# Altium PCB 20240611-SMARTCAGE-PCB-V2.PcbDoc
Units mm, origin at the board's own origin, x right, y up, seen from the top; angles counter-clockwise.
Board outline 90 x 85 mm, 2 copper layers (F.Cu, B.Cu); 9 components, 51 nets, 86 pads, 0 vias.
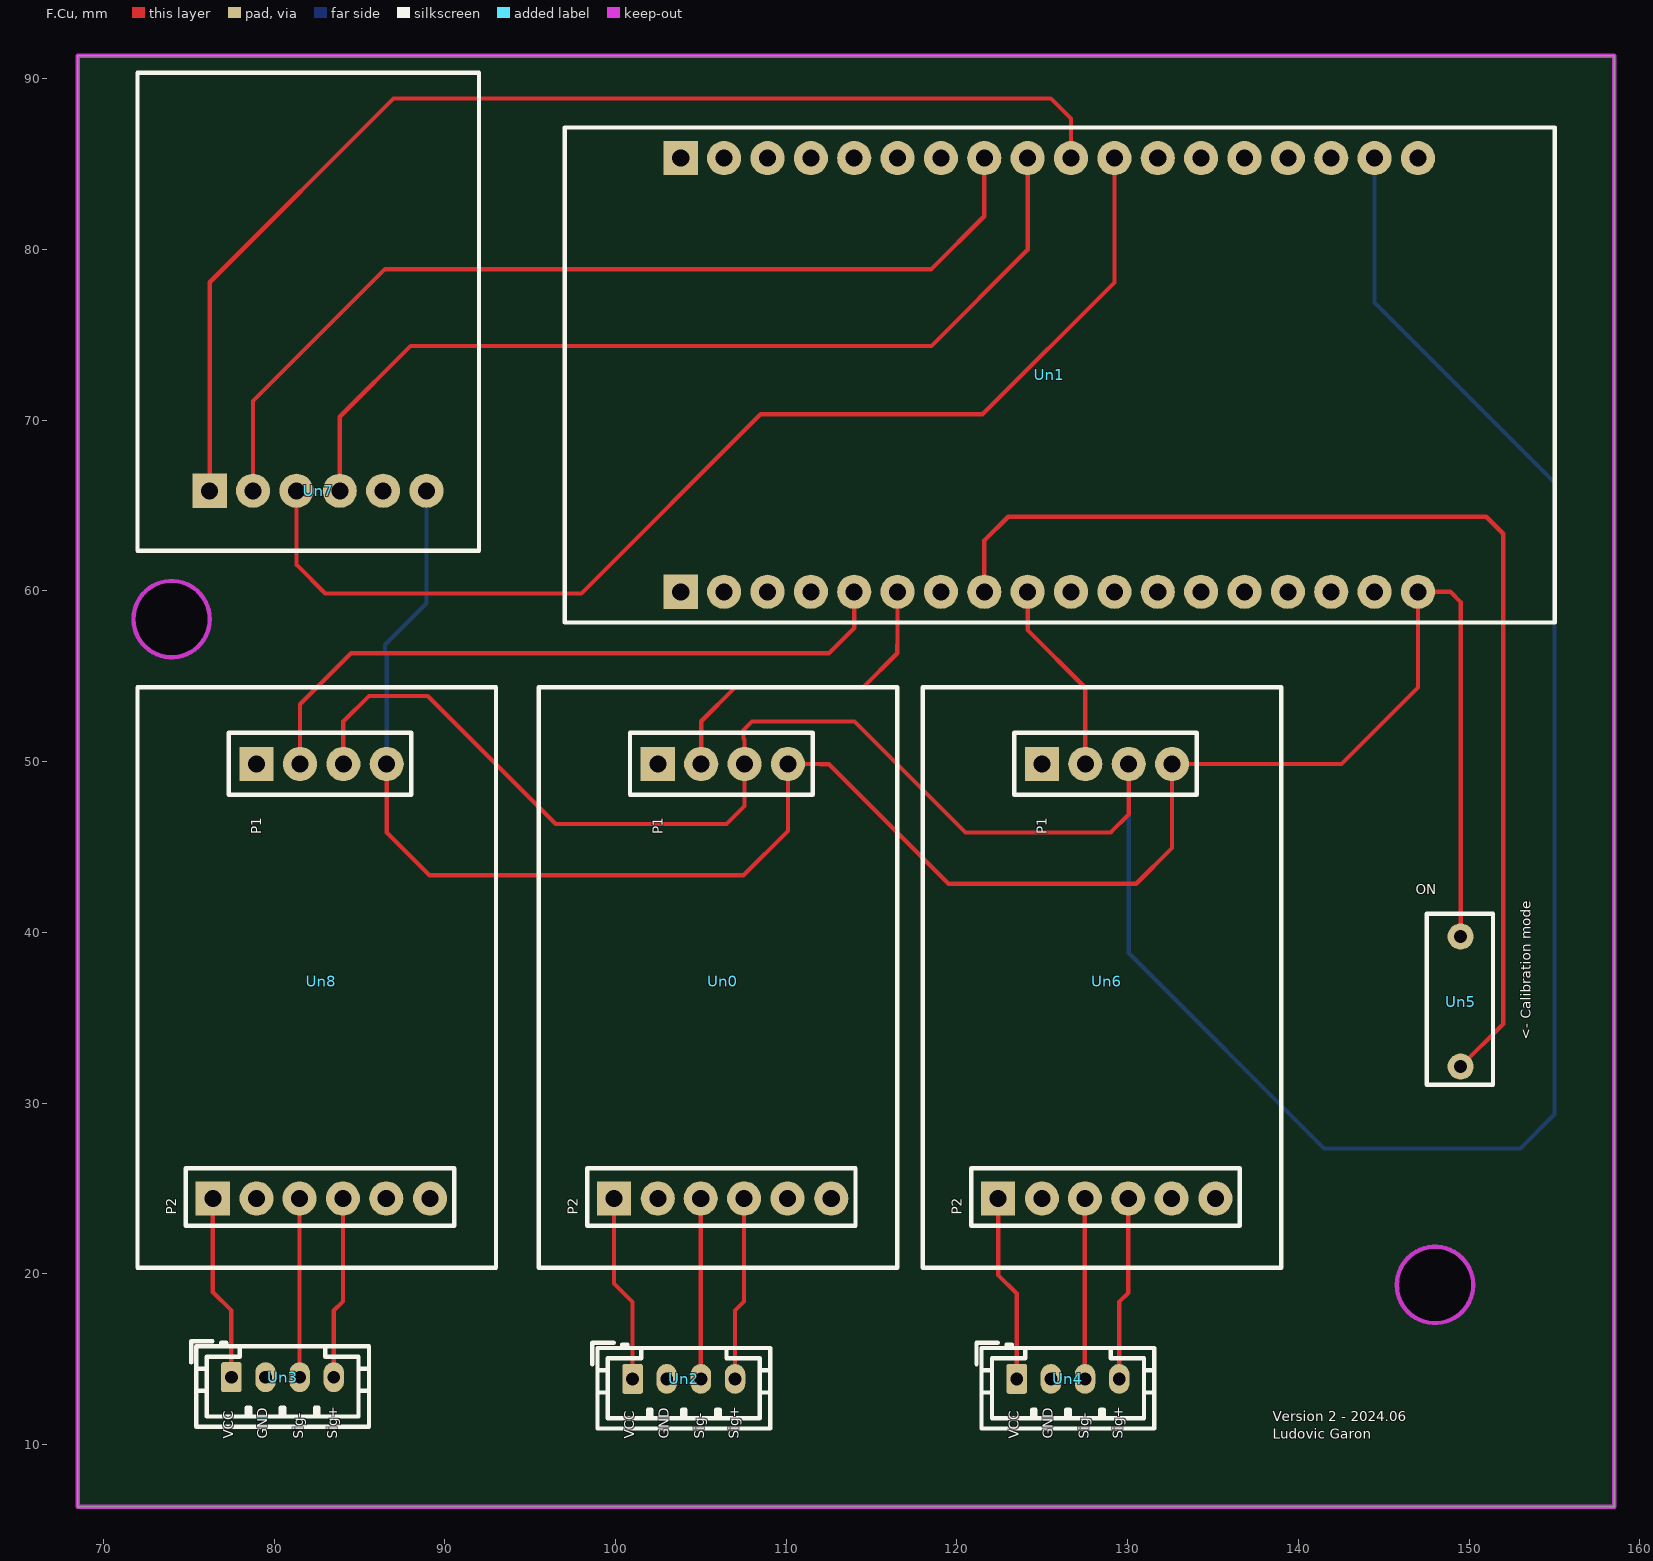
[diagram p0: F.Cu view]
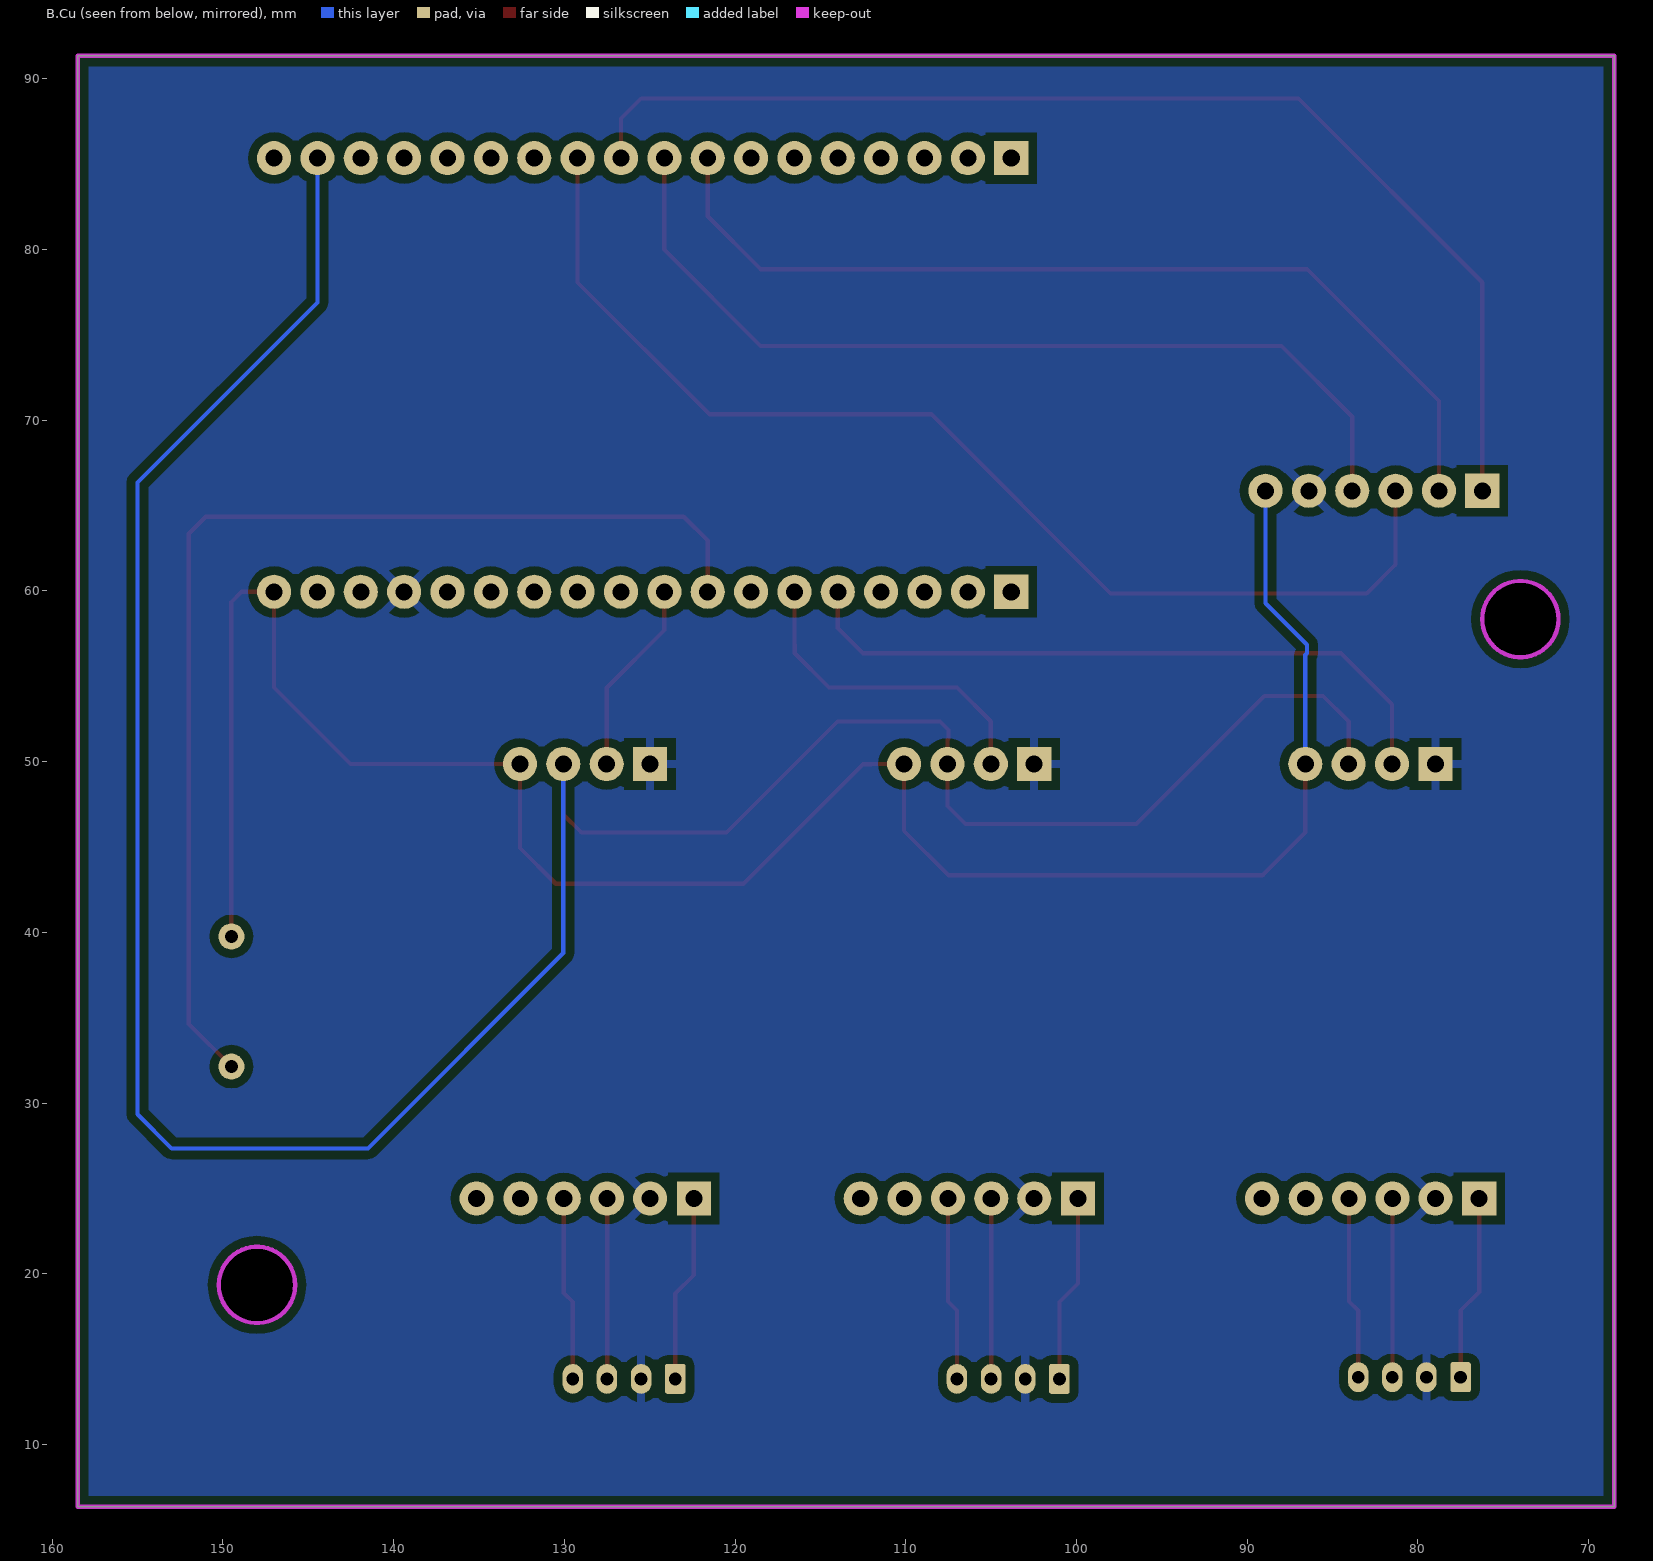
[diagram p1: B.Cu view, seen from below]

## Layer stack, top to bottom
F.Mask: solder mask 0.0102, Solder Resist, Dk 3.5
F.Cu: signal copper 0.0356
Dielectric 1: dielectric 0.32, FR-4, Dk 4.8
B.Cu: signal copper 0.0356
B.Mask: solder mask 0.0102, Solder Resist, Dk 3.5

## Board outline
68.5,91.35 68.5,6.35 158.5,6.35 158.5,91.35 68.5,91.35
cut-out: 76.001,59.35 75.868,59.598 75.589,59.939 75.248,60.218 74.86,60.426 74.438,60.554 74,60.597 73.562,60.554 73.14,60.426 73,60.351 72.752,60.218 72.411,59.939 72.132,59.598 71.924,59.21 71.796,58.788 71.753,58.35 71.796,57.912 71.924,57.49 71.999,57.35 72.132,57.102 72.411,56.761 72.752,56.482 73.14,56.274 73.562,56.146 74,56.103 74.438,56.146 74.86,56.274 75,56.349 75.248,56.482 75.589,56.761 75.868,57.102 76.076,57.49 76.204,57.912 76.247,58.35 76.204,58.788 76.076,59.21 76.001,59.35
cut-out: 150.001,20.35 149.868,20.598 149.589,20.939 149.248,21.218 148.86,21.426 148.438,21.554 148,21.597 147.562,21.554 147.14,21.426 147,21.351 146.752,21.218 146.411,20.939 146.132,20.598 145.924,20.21 145.796,19.788 145.753,19.35 145.796,18.912 145.924,18.49 145.999,18.35 146.132,18.102 146.411,17.761 146.752,17.482 147.14,17.274 147.562,17.146 148,17.103 148.438,17.146 148.86,17.274 149,17.349 149.248,17.482 149.589,17.761 149.868,18.102 150.076,18.49 150.204,18.912 150.247,19.35 150.204,19.788 150.076,20.21 150.001,20.35

## Design rules (kind name [scope] priority, off if disabled: settings)
Clearance "Clearence 0.5_Polygon" [InNamedPolygon('B.Cu-/GND')] p1: gap=0.5 ignorepadtopadclearanceinfootprint=FALSE
MinimumSolderMaskSliver [All] p1: minsoldermaskwidth=0
PolygonConnect Polygon_B.Cu-/GND_ConnectDirect [IsNamedPolygon('B.Cu-/GND') vs IsVia] p1: connectstyle=Direct reliefconductorwidth=0.254 reliefentries=4 polygonreliefangle="90 Angle" airgapwidth=0.254
PolygonConnect Polygon_B.Cu-/GND_ConnectRelief45 [IsNamedPolygon('B.Cu-/GND') vs (IsThruPin or IsSMTPin) and (PadShape_AllLayers = 'Round')] p2: connectstyle=Relief reliefconductorwidth=0.5 reliefentries=4 polygonreliefangle="45 Angle" airgapwidth=0.5
PolygonConnect Polygon_B.Cu-/GND_ConnectRelief90 [IsNamedPolygon('B.Cu-/GND') vs (IsThruPin or IsSMTPin) and (PadShape_AllLayers <> 'Round')] p3: connectstyle=Relief reliefconductorwidth=0.5 reliefentries=4 polygonreliefangle="90 Angle" airgapwidth=0.5
RoutingVias [All] p1: holewidth=0.711 width=1.27 viastyle="Through Hole" minholewidth=0.711 minwidth=1.27 maxholewidth=0.711 maxwidth=1.27
SilkToSilkClearance [All] p1: silktosilkclearance=0
SilkToSolderMaskClearance [IsPad] p1: minsilkscreentomaskgap=0 clearancetoexposedcopper=TRUE
SolderMaskExpansion [All] p1: expansion=0.102 istentingtop=FALSE
Width [All] p1: maxlimit=10 minlimit=0.254 preferedwidth=0.254 minimp=50.000000 maximp=50.000000 favimp=50.000000
27 further rules are at their usual default settings.

## Components (designator, comment, footprint, x,y, rotation, side; value= is the part's Value field where it differs from the comment)
Un0 "Comment" HX711 105.5,31.35 r180 top value=~
Un1 "Comment" "Firebeetle ESP32" 155.02,58.15 r90 top value=~
Un2 "Comment" JST_PH_B4B-PH-K_1x04_P2.00mm_Vertical 101,13.85 r0 top value=Conn_01x04_Pin
Un3 "Comment" JST_PH_B4B-PH-K_1x04_P2.00mm_Vertical 77.5,13.95 r0 top value=Conn_01x04_Pin
Un4 "Comment" JST_PH_B4B-PH-K_1x04_P2.00mm_Vertical 123.5,13.85 r0 top value=Conn_01x04_Pin
Un5 "Comment" "SWITCH SLIDE DIP SPST 25MA 24V" 149.475,35.85 r270 top value=SW_DIP_x01
Un6 "Comment" HX711 128,31.35 r180 top value=~
Un7 "Comment" "MicroSD DFRobot" 82.25,74.35 r0 top value=~
Un8 "Comment" HX711 82,31.35 r180 top value=~

## Footprints (in the part's own frame and the unit in brackets; to place one, negate y for a bottom-side part, rotate by r counter-clockwise, add the part's x,y. Pads: shape width x height; smd on the part's side, far side on the other; paste and mask are expansions set on the pad)
"Firebeetle ESP32" [mm]
  round 2 hole 1 paste-2 mask+0: 0(27.2,35.96) 1(1.8,48.66) 2(1.8,28.34) 4(27.2,15.64) 5(1.8,30.88) 6(1.8,25.8) 7(1.8,23.26) 8(1.8,20.72) 9(1.8,38.5) 10(1.8,35.96) 11(1.8,18.18) 12(27.2,18.18) 13(1.8,33.42) 14(27.2,20.72) 15(27.2,41.04) 16(27.2,13.1) 17(27.2,10.56) 18(27.2,33.42) 19(27.2,28.34) 21(27.2,25.8) 22(27.2,23.26) 23(27.2,30.88) 25(1.8,46.12) 26(1.8,43.58) 27(1.8,41.04) 34(27.2,46.12) 35(27.2,43.58) 39(27.2,48.66) 40(27.2,38.5) 41(27.2,8.02) 42(1.8,15.64) 43(1.8,13.1) 44(1.8,10.56) 45(1.8,8.02)
  rect 2x2 hole 1 paste-2 mask+0: 3(1.8,51.2) 36(27.2,51.2)
  silkscreen extent 0,0 29,58
HX711 [mm]
  rect 2x2 hole 1 paste-2 mask+0: 1(3.023,-18.517) 5(5.588,6.934)
  round 2 hole 1 paste-2 mask+0: 2(0.483,-18.517) 3(-2.057,-18.517) 4(-4.597,-18.517) 6(3.023,6.934) 7(0.508,6.934) 8(-2.032,6.934) 9(-4.572,6.934) 10(-7.137,6.934)
  silkscreen extent -11,-23 10,11
JST_PH_B4B-PH-K_1x04_P2.00mm_Vertical [mm]
  rrect21% 1.2x1.75 hole 0.75 paste-1.75 mask+0: 1(0,0)
  rrect100% 1.2x1.75 hole 0.75 paste-1.75 mask+0: 2(2,0) 3(4,0) 4(6,0)
  silkscreen extent -2.36,-2.91 8.06,2.11
"MicroSD DFRobot" [mm]
  rect 2x2 hole 1 paste-2 mask+0: 1(-6.02,-8.484)
  round 2 hole 1 paste-2 mask+0: 2(-3.48,-8.484) 3(-0.94,-8.484) 4(1.6,-8.484) 5(4.14,-8.484) 6(6.68,-8.484)
  silkscreen extent -10.25,-12 9.75,16
"SWITCH SLIDE DIP SPST 25MA 24V" [mil]
  round 60 hole 30 paste-60 mask+0: 1(-154,1) 2(146,1)
  silkscreen extent -206,-77 188,76

## Part data
Un0 Un6 Un8: library part HX711, Footprint=MyFootprints:HX711
  Un0: Reference=U2
  Un6: Reference=U3
  Un8: Reference=U1
Un1: library part "Firebeetle ESP32", Reference=U4, Footprint="MyFootprints:Firebeetle ESP32"
Un2 Un3 Un4: library part JST_PH_B4B-PH-K_1x04_P2.00mm_Vertical, "JST PH series connector, B4B-PH-K (http://www.jst-mfg.com/product/pdf/eng/ePH.pdf), generated with kicad-footprint-generator", Footprint=Connector_JST:JST_PH_B4B-PH-K_1x04_P2.00mm_Vertical, ki_fp_filters=Connector*:*_1x??_*
  Un2: Reference=J2
  Un3: Reference=J1
  Un4: Reference=J3
Un5: library part "SWITCH SLIDE DIP SPST 25MA 24V", Reference=SW1, Footprint="MyFootprints:SWITCH SLIDE DIP SPST 25MA 24V", ki_fp_filters=SW?DIP?x1*
Un7: library part "MicroSD DFRobot", Reference=U5, Footprint="MyFootprints:MicroSD DFRobot"

## Nets (pads, with @x,y where several pads share a name; then routed paths per layer and width w, separated by ;. In a path a pad name is that pad's centre, name@x,y a point inside that pad or via, vN(x,y) a via of type N, cw(c..) or ccw(c..) an arc to the next point about the centre after c; other vN are vias at no path point)
GND: Un0.1 Un0.6 Un1.42 Un2.2 Un3.2 Un4.2 Un6.1 Un6.6 Un7.5 Un8.1 Un8.6
Net-(J1-Pin_1): Un3.1 Un8.5 | length 10.9
  F.Cu w0.25: Un8.5 76.412,18.938 77.5,17.85 Un3.1
Net-(J1-Pin_3): Un3.3 Un8.7 | length 10.5
  F.Cu w0.25: Un8.7 81.492,13.958 Un3.3
Net-(J1-Pin_4): Un3.4 Un8.8 | length 10.7
  F.Cu w0.25: Un3.4 83.5,17.85 84.032,18.382 Un8.8
Net-(J2-Pin_1): Un0.5 Un2.1 | length 11
  F.Cu w0.25: Un0.5 99.912,19.438 101,18.35 Un2.1
Net-(J2-Pin_3): Un0.7 Un2.3 | length 10.6
  F.Cu w0.25: Un0.7 104.992,13.858 Un2.3
Net-(J2-Pin_4): Un0.8 Un2.4 | length 10.8
  F.Cu w0.25: Un2.4 107,17.85 107.532,18.382 Un0.8
Net-(J3-Pin_1): Un4.1 Un6.5 | length 11
  F.Cu w0.25: Un6.5 122.412,19.938 123.5,18.85 Un4.1
Net-(J3-Pin_3): Un4.3 Un6.7 | length 10.6
  F.Cu w0.25: Un6.7 127.492,13.858 Un4.3
Net-(J3-Pin_4): Un4.4 Un6.8 | length 10.8
  F.Cu w0.25: Un4.4 129.5,18.35 130.032,18.882 Un6.8
Net-(U1-DT): Un1.27 Un8.2 | length 39.9
  F.Cu w0.25: Un8.2 81.517,53.367 84.5,56.35 112.5,56.35 113.98,57.83 Un1.27
Net-(U1-SCK): Un0.3 Un1.17 Un6.3 Un8.3 | length 165.5
  F.Cu w0.25: Un8.3@84,49.809 Un8.3 84.057,52.35 85.557,53.85 89,53.85 96.5,46.35 106.5,46.35 107.557,47.407 Un0.3 107.557,51.293 107.5,51.35 107.5,51.85 108,52.35 114,52.35 120.5,45.85 129,45.85 130.057,46.907 Un6.3
  B.Cu w0.25: Un6.3 130.057,38.793 141.5,27.35 153,27.35 155,29.35 155,66.35 144.46,76.89 Un1.17
Net-(U1-VCC): Un0.4 Un1.45 Un5.1 Un6.4 Un7.6 Un8.4 | length 126
  F.Cu w0.25: Un8.4 86.597,45.85 89.097,43.35 107.5,43.35 110.097,45.947 Un0.4 111.983,49.867 112,49.85 112.5,49.85 119.5,42.85 130.5,42.85 132.597,44.947 Un6.4 142.517,49.867 147,54.35 Un1.45 148.9,59.95 149.5,59.35 Un5.1
  B.Cu w0.25: Un8.4 86.597,56.253 86.5,56.35 86.5,56.85 88.93,59.28 Un7.6
Net-(U2-DT): Un0.2 Un1.9 | length 19.3
  F.Cu w0.25: Un0.2 105.017,52.367 107,54.35 114.5,54.35 116.5,56.35 116.5,56.85 116.52,56.87 Un1.9 Un1.9@116.5,59.93
Net-(U3-DT): Un1.5 Un6.2 | length 11.5
  F.Cu w0.25: Un1.5 124.14,57.71 127.517,54.333 Un6.2
Net-(U4-IO13{slash}D7): Un1.13 Un5.2 | length 66.6
  F.Cu w0.25: Un1.13 121.6,62.95 123,64.35 151,64.35 152,63.35 152,34.642 Un5.2
Net-(U4-MISO{slash}IO19): Un1.19 Un7.1 | length 70.1
  F.Cu w0.25: Un7.1 76.23,78.08 87,88.85 125.5,88.85 126.68,87.67 Un1.19 ; Un7.1@76.23,66.366 Un7.1@76.34,66.476
Net-(U4-MOSI{slash}IO23): Un1.23 Un7.4 | length 54
  F.Cu w0.25: Un7.4 83.85,70.2 88,74.35 118.5,74.35 124.14,79.99 Un1.23
Net-(U4-SCK{slash}IO18): Un1.18 Un7.2 | length 56
  F.Cu w0.25: Un7.2 78.77,71.12 86.5,78.85 118.5,78.85 121.6,81.95 Un1.18
Net-(U4-SDA{slash}IO21): Un1.21 Un7.3 | length 67.8
  F.Cu w0.25: Un7.3 81.31,61.54 83,59.85 98,59.85 108.5,70.35 121.5,70.35 129.22,78.07 Un1.21
unconnected-(U1-INB+-Pad9): Un8.9
unconnected-(U1-INB--Pad10): Un8.10
unconnected-(U2-INB+-Pad9): Un0.9
unconnected-(U2-INB--Pad10): Un0.10
unconnected-(U3-INB+-Pad9): Un6.9
unconnected-(U3-INB--Pad10): Un6.10
unconnected-(U4-3V3-Pad44): Un1.44
unconnected-(U4-A0{slash}IO36-Pad36): Un1.36
unconnected-(U4-A1{slash}IO39-Pad39): Un1.39
unconnected-(U4-A2{slash}IO34-Pad34): Un1.34
unconnected-(U4-A3{slash}1035-Pad35): Un1.35
unconnected-(U4-A4{slash}IO15-Pad15): Un1.15
unconnected-(U4-AREF-Pad43): Un1.43
unconnected-(U4-BCLK{slash}IO14-Pad14): Un1.14
unconnected-(U4-D0{slash}IO4-Pad4): Un1.4
unconnected-(U4-D1{slash}IO16-Pad16): Un1.16
unconnected-(U4-IO0-Pad0): Un1.0
unconnected-(U4-IO1{slash}TXD-Pad1): Un1.1
unconnected-(U4-IO2{slash}D9-Pad2): Un1.2
unconnected-(U4-IO3{slash}RXD-Pad3): Un1.3
unconnected-(U4-IO6{slash}CLK-Pad6): Un1.6
unconnected-(U4-IO7{slash}SD0-Pad7): Un1.7
unconnected-(U4-IO8{slash}SD1-Pad8): Un1.8
unconnected-(U4-IO10{slash}D6-Pad10): Un1.10
unconnected-(U4-IO11{slash}CMD-Pad11): Un1.11
unconnected-(U4-IO25{slash}D2-Pad25): Un1.25
unconnected-(U4-IO26{slash}D3-Pad26): Un1.26
unconnected-(U4-MCLK{slash}IO12-Pad12): Un1.12
unconnected-(U4-NC-Pad40): Un1.40
unconnected-(U4-RST-Pad41): Un1.41
unconnected-(U4-SCL{slash}IO22-Pad22): Un1.22

## Polygon pours and split planes (outlines as drawn)
GND on B.Cu "B.Cu-/GND" (solid, remove dead copper, pour order 0): 68.5,91.35 158.5,91.35 158.5,6.35 68.5,6.35

## Keep-outs
Edge.Cuts:
  circle w0.254: c148,19.35 r2.236
  circle w0.254: c74,58.35 r2.236
  circle w0: c74,58.35 r2.236
  lines w0: 68.5,6.35 158.5,6.35 158.5,91.35 68.5,91.35 68.5,6.35
  lines w0.254: 68.5,6.35 158.5,6.35 158.5,91.35 68.5,91.35 68.5,6.35

## Silkscreen, mask and mechanical layers (free items; w line width, h text height)
F.SilkS:
  text "ON" at 146.871,42.037 h1
  text "<- Calibration mode" at 153.82,33.71 h1 r90
  text "VCC" at 77.813,10.349 h1 r90
  text "GND" at 79.813,10.35 h1 r90
  text "Sig-" at 81.911,10.35 h1 r90
  text "Sig+" at 83.911,10.35 h1 r90
  text "VCC" at 101.313,10.349 h1 r90
  text "GND" at 103.313,10.35 h1 r90
  text "Sig-" at 105.411,10.35 h1 r90
  text "Sig+" at 107.411,10.35 h1 r90
  text "VCC" at 123.813,10.349 h1 r90
  text "GND" at 125.813,10.35 h1 r90
  text "Sig-" at 127.911,10.35 h1 r90
  text "Sig+" at 129.911,10.35 h1 r90
  text "Version 2 - 2024.06 / Ludovic Garon" at 138.5,10.15 h1

## Dimensions
158.5,8.35 to 68.5,8.35 on Eco1.User
158.5,6.35 to 158.5,92.85 on Eco1.User

## Text inside footprints (layer, text, board x,y; h text height)
Un0: F.SilkS "P1" at 102.96,45.752 h1 r90; F.SilkS "P2" at 97.981,23.476 h1 r90
Un6: F.SilkS "P2" at 120.481,23.476 h1 r90; F.SilkS "P1" at 125.46,45.752 h1 r90
Un8: F.SilkS "P1" at 79.46,45.752 h1 r90; F.SilkS "P2" at 74.481,23.476 h1 r90